# Altium PCB DAS_ad7606.PcbDoc
Units mm, origin at the board's own origin, x right, y up, seen from the top; angles counter-clockwise.
Board outline 100 x 58.42 mm, 2 copper layers (Top Layer, Bottom Layer), stack 1.58 mm thick; 39 components, 116 nets, 384 pads, 99 vias.
Unrouted connection lines stored in the file: 3.
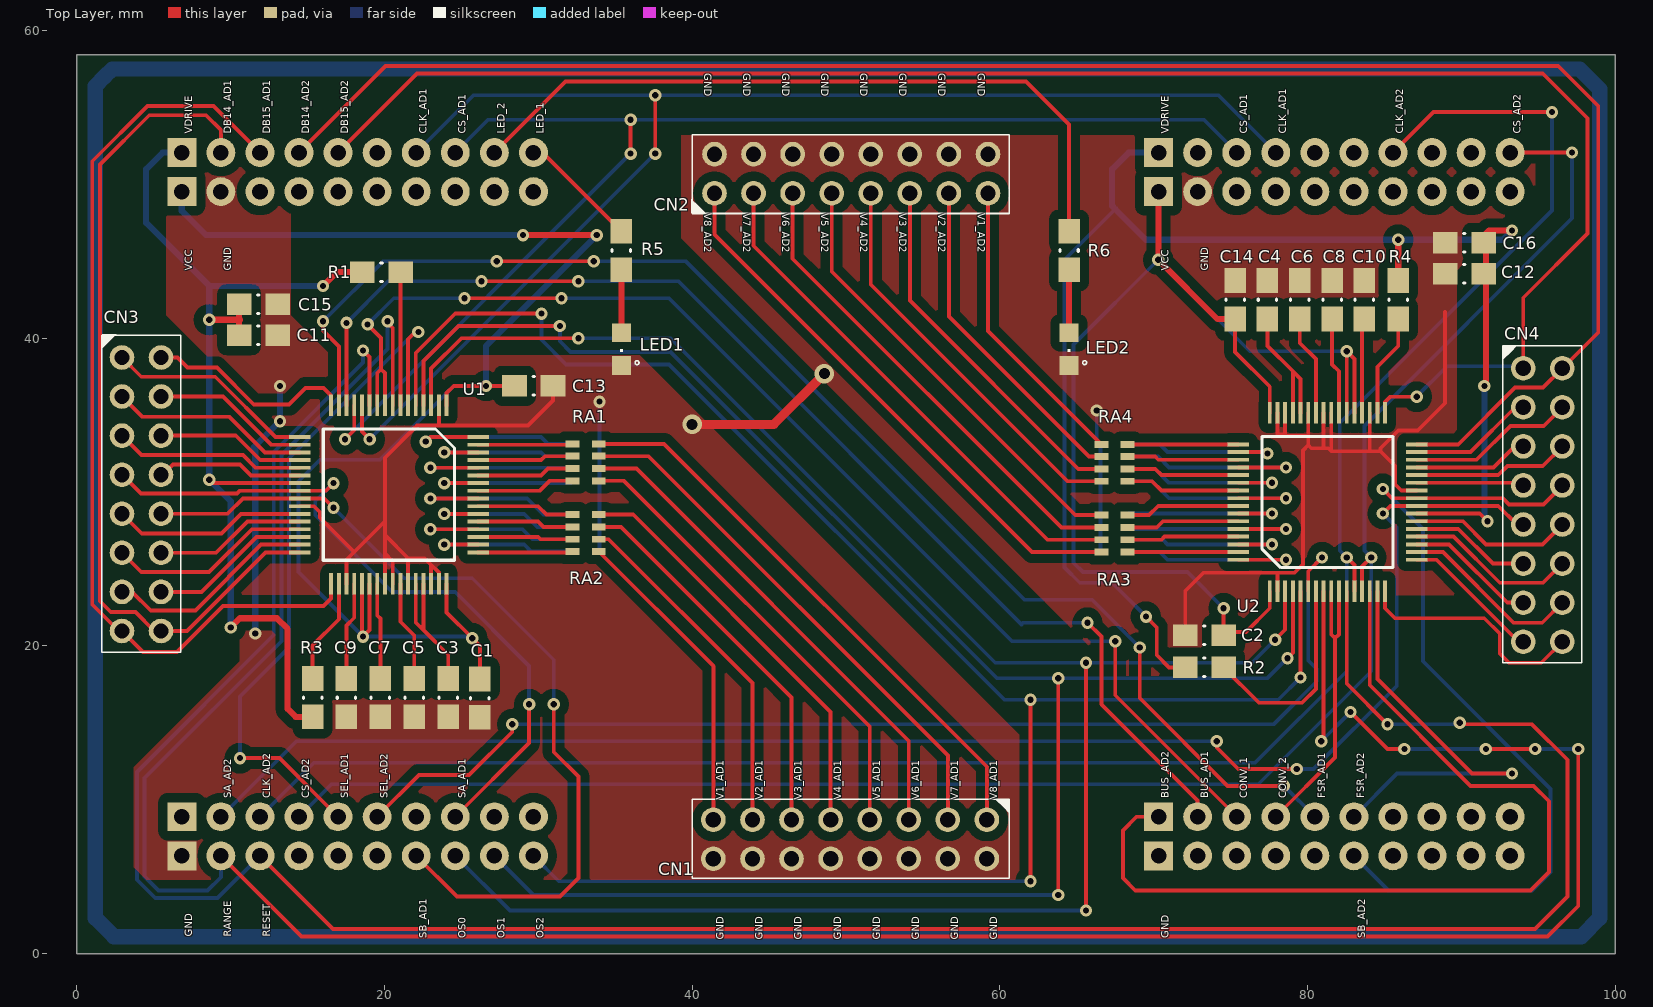
[diagram p0: Top Layer view]
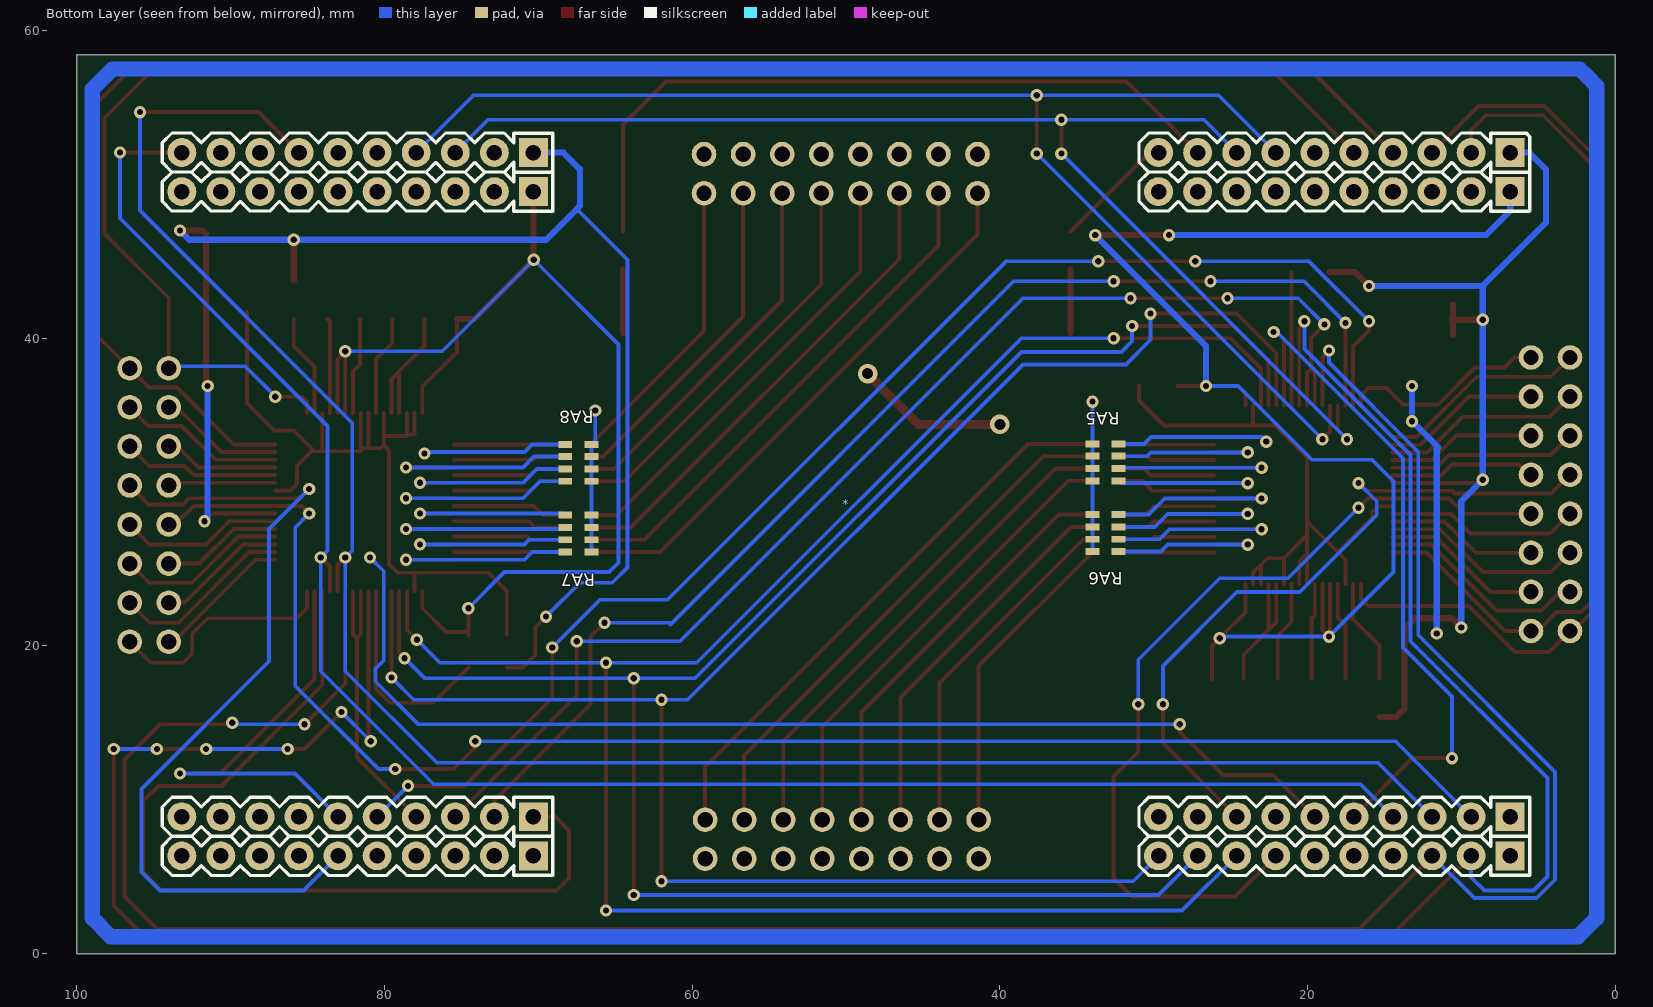
[diagram p1: Bottom Layer view, seen from below]

## Layer stack, top to bottom
Top Solder: solder mask 0.0102, Solder Resist, Dk 3.5
Top Layer: signal copper 0.0356
Dielectric 1: dielectric 1.5086, FR-4, Dk 4.8
Bottom Layer: signal copper 0.0356
Bottom Solder: solder mask 0.0102, Solder Resist, Dk 3.5

## Board outline
0,0 0,58.42 100,58.42 100,0

## Design rules (kind name [scope] priority, off if disabled: settings)
BoardOutlineClearance [All] p1: gap=0.254 ignorepadtopadclearanceinfootprint=FALSE except(0: Arc-SplitContinuation Track-SplitContinuation SMDPad-SplitContinuation THPad-SplitContinuation Via-SplitContinuation Fill-SplitContinuation Poly-SplitContinuation Region-SplitContinuation Text-SplitContinuation)
Clearance [All] p1: gap=0.25 ignorepadtopadclearanceinfootprint=FALSE except(0: Arc-Hole Track-Hole SMDPad-Hole THPad-Hole Via-Hole Fill-Hole Poly-Hole Region-Hole Text-Hole; 0.35: Arc-Region Arc-Text Track-Region Track-Text SMDPad-Region SMDPad-Text THPad-Region THPad-Text Via-Region Via-Text Fill-Region Fill-Text Poly-Region Poly-Text Region-Region Region-Text Text-Text; 0.6: Arc-Poly Track-Poly SMDPad-Poly THPad-Poly Via-Poly Fill-Poly Poly-Poly)
ComponentClearance [All] p1 off: gap=0.05 collisioncheckmode=3 verticalgap=2540 showdistances=TRUE
ComponentClearance ComponentClearance_1 [All vs (InComponentClass('PINs for PhotoBoard'))] p2 off: gap=0 collisioncheckmode=3 verticalgap=2540 showdistances=TRUE
ComponentClearance ComponentClearance_2 [All] p3: gap=0.254 collisioncheckmode=3 verticalgap=2540 showdistances=FALSE
HoleSize [All] p1: absolutevalues=TRUE maxlimit=2540 minlimit=0.4 maxpercent=80.000 minpercent=20.000
HoleToHoleClearance [All] p1: gap=0.25 allowstackedmicrovias=TRUE
MinimumSolderMaskSliver "Bottom Layer Logo Rule CLean" [(OnLayer('Bottom Solder') AND IsTrack) vs (OnLayer('Bottom Solder') AND IsTrack)] p1: minsoldermaskwidth=0.24
MinimumSolderMaskSliver "Top Layer Logo Rule CLean" [(OnLayer('Top Solder') AND IsTrack) vs (OnLayer('Top Solder') AND IsTrack)] p2: minsoldermaskwidth=0
MinimumSolderMaskSliver [All] p3: minsoldermaskwidth=0.24
PolygonConnect ThermalVias [IsVia] p1: connectstyle=Direct reliefconductorwidth=0.254 reliefentries=4 polygonreliefangle="90 Angle" airgapwidth=0.254
PolygonConnect [All] p2: connectstyle=Direct reliefconductorwidth=0.254 reliefentries=4 polygonreliefangle="90 Angle" airgapwidth=0.254
RoutingVias [All] p1: holewidth=0.4 width=0.8 viastyle="Through Hole" minholewidth=0.4 minwidth=0.8 maxholewidth=1 maxwidth=1.4
SilkToSilkClearance [All] p1 off: silktosilkclearance=0
SilkToSolderMaskClearance [IsPad] p1 off: minsilkscreentomaskgap=0.1 clearancetoexposedcopper=TRUE
SolderMaskExpansion [All] p1: expansion=0.102
Width [All] p1: maxlimit=2 minlimit=0.25 preferedwidth=0.6
24 further rules are at their usual default settings.

## Components (designator, comment, footprint, x,y, rotation, side; value= is the part's Value field where it differs from the comment)
* "Conector_C2000" Conector_C2000 50,29.21 r0 bottom locked
C1 "SMD Capacitor" CAP0805_wave 26.2,16.6 r90 top value="100nF 50V"
C2 "SMD Capacitor" CAP0805_wave 73.3,20.7 r0 top value="100nF 50V"
C3 "SMD Capacitor" CAP0805_wave 24.139,16.63 r90 top value="10UF 50V"
C4 "SMD Capacitor" CAP0805_wave 77.4,42.5 r270 top value="10UF 50V"
C5 "SMD Capacitor" CAP0805_wave 21.934,16.63 r90 top value="10UF 50V"
C6 "SMD Capacitor" CAP0805_wave 79.5,42.5 r270 top value="10UF 50V"
C7 "SMD Capacitor" CAP0805_wave 19.73,16.63 r90 top value="1UF 50V"
C8 "SMD Capacitor" CAP0805_wave 81.6,42.5 r270 top value="1UF 50V"
C9 "SMD Capacitor" CAP0805_wave 17.526,16.63 r90 top value="1UF 50V"
C10 "SMD Capacitor" CAP0805_wave 83.7,42.5 r270 top value="1UF 50V"
C11 "SMD Capacitor" CAP0805_wave 11.8,40.2 r180 top value="100nF 50V"
C12 "SMD Capacitor" CAP0805_wave 90.2,44.2 r0 top value="100nF 50V"
C13 "SMD Capacitor" CAP0805_wave 29.7,36.9 r180 top value="10UF 50V"
C14 "SMD Capacitor" CAP0805_wave 75.3,42.5 r270 top value="10UF 50V"
C15 "SMD Capacitor" CAP0805_wave 11.8,42.2 r180 top value="10UF 50V"
C16 "SMD Capacitor" CAP0805_wave 90.2,46.2 r0 top value="10UF 50V"
CN1 "Conector IDC Macho 16 Vias 90°" "HEADER 2x8 - 90g" 50.31,7.53 r180 top locked value=16vias
CN2 "Conector IDC Macho 16 Vias 90°" "HEADER 2x8 - 90g" 50.3,50.6 r0 top locked value=16vias
CN3 "Conector IDC Macho 16 Vias 90°" "HEADER 2x8 - 180g" 4.1,29.9 r270 top value=16vias
CN4 "Conector IDC Macho 16 Vias 90°" "HEADER 2x8 - 180g" 95.2,29.2 r270 top value=16vias
LED1 "LEDCHIPLED_0805" CHIPLED_0805 35.4,39.3 r180 top
LED2 "LEDCHIPLED_0805" CHIPLED_0805 64.5,39.3 r180 top
R1 "Resistor 0805" RES0805_wave 19.8,44.3 r0 top value="10k 1%"
R2 "Resistor 0805" RES0805_wave 73.3,18.6 r0 top value="10k 1%"
R3 "Resistor 0805" RES0805_wave 15.321,16.63 r270 top value="10k 1%"
R4 "Resistor 0805" RES0805_wave 85.9,42.5 r90 top value="10k 1%"
R5 "Resistor 0805" RES0805_wave 35.4,45.7 r270 top value="10k 1%"
R6 "Resistor 0805" RES0805_wave 64.5,45.7 r270 top value="10k 1%"
RA1 "Resistor Array 1206 4 vias" "RES_Array 1206 - 4 vias"#1 33.08,31.93 r270 top value="10k 1%"
RA2 "Resistor Array 1206 4 vias" "RES_Array 1206 - 4 vias"#1 33.08,27.33 r270 top value="10k 1%"
RA3 "Resistor Array 1206 4 vias" "RES_Array 1206 - 4 vias"#1 67.45,27.3 r90 top value="10k 1%"
RA4 "Resistor Array 1206 4 vias" "RES_Array 1206 - 4 vias"#1 67.45,31.9 r90 top value="10k 1%"
RA5 "Resistor Array 1206 4 vias" "RES_Array 1206 - 4 vias"#2 33.13,31.93 r270 bottom value="10k 1%"
RA6 "Resistor Array 1206 4 vias" "RES_Array 1206 - 4 vias"#2 33.13,27.33 r270 bottom value="10k 1%"
RA7 "Resistor Array 1206 4 vias" "RES_Array 1206 - 4 vias"#2 67.4,27.3 r90 bottom value="10k 1%"
RA8 "Resistor Array 1206 4 vias" "RES_Array 1206 - 4 vias"#2 67.4,31.9 r90 bottom value="10k 1%"
U1 "AD7606" "LQFP ST-64-2" 24.03,35.33 r270 top locked
U2 "AD7606" "LQFP ST-64-2" 77.55,23.85 r90 top

## Footprints (in the part's own frame and the unit in brackets; to place one, negate y for a bottom-side part, rotate by r counter-clockwise, add the part's x,y. Pads: shape width x height; smd on the part's side, far side on the other; paste and mask are expansions set on the pad)
CAP0805_wave [mm]
  rect 1.6x1.4 smd: 1(-1.25,0) 2(1.25,0)
  silkscreen extent -0.05,-0.6 0.05,0.6, body extent -1,-0.62 1,0.63, height 0.79
CHIPLED_0805 [mil] "CHIPLED_0805"
  rect 48x48 smd: A(0,-41.34) C(0,42)
  silkscreen extent -45,0 4,40, body extent -25,-40 25,40, height 43
Conector_C2000 [mil]
  rect 74x74 hole 40: 1(-1700,-900) 20(-1700,900) 21(-1700,-800) 40(-1700,800) 41(800,-900) 60(800,900) 61(800,-800) 80(800,800)
  round 74 hole 40: 2(-1600,-900) 3(-1500,-900) 4(-1400,-900) 5(-1300,-900) 6(-1200,-900) 7(-1100,-900) 8(-1000,-900) 9(-900,-900) 10(-800,-900) 11(-800,900) 12(-900,900) 13(-1000,900) 14(-1100,900) 15(-1200,900) 16(-1300,900) 17(-1400,900) 18(-1500,900) 19(-1600,900) 22(-1600,-800) 23(-1500,-800) 24(-1400,-800) 25(-1300,-800) 26(-1200,-800) 27(-1100,-800) 28(-1000,-800) 29(-900,-800) 30(-800,-800) 31(-800,800) 32(-900,800) 33(-1000,800) 34(-1100,800) 35(-1200,800) 36(-1300,800) 37(-1400,800) 38(-1500,800) 39(-1600,800) 42(900,-900) 43(1000,-900) 44(1100,-900) 45(1200,-900) 46(1300,-900) 47(1400,-900) 48(1500,-900) 49(1600,-900) 50(1700,-900) 51(1700,900) 52(1600,900) 53(1500,900) 54(1400,900) 55(1300,900) 56(1200,900) 57(1100,900) 58(1000,900) 59(900,900) 62(900,-800) 63(1000,-800) 64(1100,-800) 65(1200,-800) 66(1300,-800) 67(1400,-800) 68(1500,-800) 69(1600,-800) 70(1700,-800) 71(1700,800) 72(1600,800) 73(1500,800) 74(1400,800) 75(1300,800) 76(1200,800) 77(1100,800) 78(1000,800) 79(900,800)
  Top Layer lines w10: -800,-900 -780,-920
  silkscreen extent -1750,-950 1750,950, body extent -1749,-945 1763,955, height 429
"HEADER 2x8 - 90g" [mm]
  round 1.6 hole 1: 1(-8.85,-1.17) 2(-6.31,-1.17) 3(-3.77,-1.17) 4(-1.23,-1.17) 5(1.31,-1.17) 6(3.85,-1.17) 7(6.39,-1.17) 8(8.93,-1.17) 9(8.93,1.37) 10(6.39,1.37) 11(3.85,1.37) 12(1.31,1.37) 13(-1.23,1.37) 14(-3.77,1.37) 15(-6.31,1.37) 16(-8.85,1.37)
  silkscreen extent -10.34,-2.49 10.3,2.64, body extent -11.5,-1.47 11.54,11.87, height 10.37
"HEADER 2x8 - 180g" [mm]
  round 1.6 hole 1: 1(-8.85,-1.17) 2(-6.31,-1.17) 3(-3.77,-1.17) 4(-1.23,-1.17) 5(1.31,-1.17) 6(3.85,-1.17) 7(6.39,-1.17) 8(8.93,-1.17) 9(8.93,1.37) 10(6.39,1.37) 11(3.85,1.37) 12(1.31,1.37) 13(-1.23,1.37) 14(-3.77,1.37) 15(-6.31,1.37) 16(-8.85,1.37)
  silkscreen extent -10.34,-2.49 10.3,2.64, body extent -13.87,-4.29 14.07,4.6, height 9.56
"LQFP ST-64-2" [mm]
  rect 1.4x0.25 smd: 1(-0.3,0) 2(-0.3,-0.5) 3(-0.3,-1) 4(-0.3,-1.5) 5(-0.3,-2) 6(-0.3,-2.5) 7(-0.3,-3) 8(-0.3,-3.5) 9(-0.3,-4) 10(-0.3,-4.5) 11(-0.3,-5) 12(-0.3,-5.5) 13(-0.3,-6) 14(-0.3,-6.5) 15(-0.3,-7) 16(-0.3,-7.5) 33(11.3,-7.5) 34(11.3,-7) 35(11.3,-6.5) 36(11.3,-6) 37(11.3,-5.5) 38(11.3,-5) 39(11.3,-4.5) 40(11.3,-4) 41(11.3,-3.5) 42(11.3,-3) 43(11.3,-2.5) 44(11.3,-2) 45(11.3,-1.5) 46(11.3,-1) 47(11.3,-0.5) 48(11.3,0)
  rect 0.25x1.4 smd: 17(1.75,-9.55) 18(2.25,-9.55) 19(2.75,-9.55) 20(3.25,-9.55) 21(3.75,-9.55) 22(4.25,-9.55) 23(4.75,-9.55) 24(5.25,-9.55) 25(5.75,-9.55) 26(6.25,-9.55) 27(6.75,-9.55) 28(7.25,-9.55) 29(7.75,-9.55) 30(8.25,-9.55) 31(8.75,-9.55) 32(9.25,-9.55) 49(9.25,2.05) 50(8.75,2.05) 51(8.25,2.05) 52(7.75,2.05) 53(7.25,2.05) 54(6.75,2.05) 55(6.25,2.05) 56(5.75,2.05) 57(5.25,2.05) 58(4.75,2.05) 59(4.25,2.05) 60(3.75,2.05) 61(3.25,2.05) 62(2.75,2.05) 63(2.25,2.05) 64(1.75,2.05)
  silkscreen extent 1.23,-8.01 9.76,0.52, body extent -0.5,-9.75 11.5,2.25, height 1.6
RES0805_wave [mm] "Chip Resistor, 2-Leads, Body 2,00x1,25mm, IPC Medium Density"
  rect 1.6x1.4 smd: 1(-1.25,0) 2(1.25,0)
  silkscreen extent -0.05,-0.6 0.05,0.6, body extent -1,-0.62 1,0.63, height 0.79
"RES_Array 1206 - 4 vias"#1 [mm]
  rect 0.45x0.9 smd mask+0.095: 1(-1.2,-0.85) 2(-0.4,-0.85) 3(0.4,-0.85) 4(1.2,-0.85) 5(1.2,0.85) 6(0.4,0.85) 7(-0.4,0.85) 8(-1.2,0.85)
  body extent -1.6,-0.8 1.6,0.8, height 0.5
"RES_Array 1206 - 4 vias"#2 [mm]
  rect 0.45x0.9 smd mask+0.095: 1(-1.2,0.85) 2(-0.4,0.85) 3(0.4,0.85) 4(1.2,0.85) 5(1.2,-0.85) 6(0.4,-0.85) 7(-0.4,-0.85) 8(-1.2,-0.85)
  body extent -1.6,-0.8 1.6,0.8, height 0.5

## Part data
C1 C2 C3 C4 C5 C6 C11 C12 C13 C14 C15 C16: library part "Capacitor 0805", "CAP CER 100nF 50V 10%  0805", Manufacturer=ANY, Operating Temperature="-55°C ~ 125°C", Package / Case="0805 (2012 Metric)", Temperature Coefficient=X7R, Tolerance=±10%, Voltage - Rated=50V, ComponentLink1Description=http://www.kemet.com/docfinder?Partnumber=C0805C102K5RACTU, ComponentLink1URL=http://www.kemet.com/docfinder?Partnumber=C0805C102K5RACTU, Features=-, Height - Seated (Max)=-, Lead Spacing=-, Lead Style=-, Mounting Type="Surface Mount, MLCC", RoHS="RoHS Compliant", Size / Dimension="0.079\" L x 0.049\" W (2.00mm x 1.25mm)", Thickness (Max)="0.035\" (0.88mm)"
C7 C8 C9 C10: library part "Capacitor 0805", "CAP CER 1UF 50V 10%  0805", Manufacturer=ANY, Operating Temperature="-55°C ~ 125°C", Package / Case="0805 (2012 Metric)", Temperature Coefficient=X7R, Tolerance=±10%, Voltage - Rated=50V, ComponentLink1Description=http://www.kemet.com/docfinder?Partnumber=C0805C102K5RACTU, ComponentLink1URL=http://www.kemet.com/docfinder?Partnumber=C0805C102K5RACTU, Features=-, Height - Seated (Max)=-, Lead Spacing=-, Lead Style=-, Mounting Type="Surface Mount, MLCC", RoHS="RoHS Compliant", Size / Dimension="0.079\" L x 0.049\" W (2.00mm x 1.25mm)", Thickness (Max)="0.035\" (0.88mm)"
LED1 LED2: "<b>LED</b><p> / <u>OSRAM</u>:<br> /  / - <u>CHIPLED</u><br> / LG R971, LG N971, LY N971, LG Q971, LY Q971, LO R971, LY R971 / LH N974, LH R974<br> / LS Q976, LO Q976, LY Q976<br> / LO Q996<br> /  / - <u>Hyper CHIPLED</u><br> / LW Q18S<br> / LB Q993, LB Q99A, LB R99A<br> /  / - <u>SideLED</u><br> / LS A670, LO A670, LY A670, LG A670, LP A670<br> / LB A673, LV A673, LT A673, LW A673<br> / LH A674<br> / LY A675<br> / LS A676, LA A676, LO A676, LY A676, LW A676<br> / LS A679, LY A679, LG A679<br> /  / -  <u>Hyper Micro SIDELED®</u><br> / LS Y876, LA Y876, LO Y876, LY Y876<br> / LT Y87S<br> /  / - <u>SmartLED</u><br> / LW L88C, LW L88S<br> / LB L89C, LB L89S, LG L890<br> / LS L89K, LO L89K, LY L89K<br> / LS L896, LA L896, LO L896, LY L896<br> /  / - <u>TOPLED</u><br> / LS T670, LO T670, LY T670, LG T670, LP T670<br> / LSG T670, LSP T670, LSY T670, LOP T670, LYG T670<br> / LG T671, LOG T671, LSG T671<br> / LB T673, LV T673, LT T673, LW T673<br> / LH T674<br> / LS T676, LA T676, LO T676, LY T676, LB T676, LH T676, LSB T676, LW T676<br> / LB T67C, LV T67C, LT T67C, LS T67K, LO T67K, LY T67K, LW E67C<br> / LS E67B, LA E67B, LO E67B, LY E67B, LB E67C, LV E67C, LT E67C<br> / LW T67C<br> / LS T679, LY T679, LG T679<br> / LS T770, LO T770, LY T770, LG T770, LP T770<br> / LB T773, LV T773, LT T773, LW T773<br> / LH T774<br> / LS E675, LA E675, LY E675, LS T675<br> / LS T776, LA T776, LO T776, LY T776, LB T776<br> / LHGB T686<br> / LT T68C, LB T68C<br> /  / - <u>Hyper Mini TOPLED®</u><br> / LB M676<br> /  / - <u>Mini TOPLED Santana®</u><br> / LG M470<br> / LS M47K, LO M47K, LY M47K / <p> / Source: http://www.osram.convergy.de<p> /  / <u>LUXEON:</u><br> / - <u>LUMILED®</u><br> / LXK2-PW12-R00, LXK2-PW12-S00, LXK2-PW14-U00, LXK2-PW14-V00<br> / LXK2-PM12-R00, LXK2-PM12-S00, LXK2-PM14-U00<br> / LXK2-PE12-Q00, LXK2-PE12-R00, LXK2-PE12-S00, LXK2-PE14-T00, LXK2-PE14-U00<br> / LXK2-PB12-K00, LXK2-PB12-L00, LXK2-PB12-M00, LXK2-PB14-N00, LXK2-PB14-P00, LXK2-PB14-Q00<br> / LXK2-PR12-L00, LXK2-PR12-M00, LXK2-PR14-Q00, LXK2-PR14-R00<br> / LXK2-PD12-Q00, LXK2-PD12-R00, LXK2-PD12-S00<br> / LXK2-PH12-R00, LXK2-PH12-S00<br> / LXK2-PL12-P00, LXK2-PL12-Q00, LXK2-PL12-R00 / <p> / Source: www.luxeon.com<p> /  / <u>KINGBRIGHT:</U><p> / KA-3528ASYC<br> / Source: www.kingbright.com"
R1 R2 R3 R4 R5 R6: "RES SMD 10K OHM 1% 1/8W 0805", Manufacturer=ANY, Operating Temperature="-55°C ~ 155°C", Package / Case="0805 (2012 Metric)", Power (Watts)="0.125W, 1/8W", Temperature Coefficient=±100ppm/°C, Category=Resistors, ComponentLink1Description=http://www.yageo.com/documents/recent/PYu-RC_Group_51_RoHS_L_2.pdf, ComponentLink1URL=http://www.yageo.com/documents/recent/PYu-RC_Group_51_RoHS_L_2.pdf, Composition="Thick Film", Features="Moisture Resistant", Height="0.024\" (0.60mm)", RoHS="RoHS Compliant", Size / Dimension="0.079\" L x 0.049\" W (2.00mm x 1.25mm)"
RA1 RA2 RA3 RA4 RA5 RA6 RA7 RA8: "RES ARRAY 4 RES 10K OHM 1206", Manufacturer=Yageo, Manufacturer Part Number=YC164-JR-0710KL, Number of Resistors=4, Operating Temperature="-55°C ~ 155°C", Package / Case="1206 (3216 Metric), Convex, Long Side Terminals", Power Per Element=62.5mW, Resistance (Ohms)=10k, Temperature Coefficient=±200ppm/°C, Tolerance=±5%, Applications="DDRAM, SDRAM", Category=Resistors, Circuit Type=Isolated, ComponentLink1Description=http://www.yageo.com/NewPortal/yageodocoutput?fileName=/pdf/R-Chip/PYu-YC_TC_group_51_RoHS_L_2.pdf, ComponentLink1URL=http://www.yageo.com/NewPortal/yageodocoutput?fileName=/pdf/R-Chip/PYu-YC_TC_group_51_RoHS_L_2.pdf, Height="0.028\" (0.70mm)", Mounting Type="Surface Mount", Number of Pins=8, Packaging="Tape & Reel (TR)", RoHS="RoHS Compliant", Size / Dimension="0.126\" L x 0.063\" W (3.20mm x 1.60mm)"
U1 U2: "DAS ADC"

## Via types
v1: diameter 0.8, hole 0.4, Top Layer to Bottom Layer, 97 vias
v2: diameter 1.27, hole 0.711, Top Layer to Bottom Layer, 2 vias

## Nets (pads, with @x,y where several pads share a name; then routed paths per layer and width w, separated by ;. In a path a pad name is that pad's centre, name@x,y a point inside that pad or via, vN(x,y) a via of type N, cw(c..) or ccw(c..) an arc to the next point about the centre after c; other vN are vias at no path point)
BUSY_AD1: *.79 U1.14 | length 79.5
  Top Layer w0.25: U1.14 v1(17.53,41) ; v1(26.3,43.7) v1(32.6,43.7) ; v1(65.7,21.5) 66.6,20.6 66.6,16.2 72.86,9.94 *.79
  Bottom Layer w0.25: v1(17.53,41) 20.23,43.7 v1(26.3,43.7) ; v1(32.6,43.7) 39.1,43.7 61.4,21.4 61.5,21.5 v1(65.7,21.5)
BUSY_AD2: *.80 U2.14 | length 59.8
  Top Layer w0.25: *.80 68.89,8.89 68,8 68,4.9 68.8,4.1 94.5,4.1 95.7,5.3 95.7,9.9 94.7,10.9 90.6,10.9 84.05,17.45 U2.14
CONVST_1: *.78 U1.9 U1.10 | length 81.5
  Top Layer w0.25: v1(18.9,40.9) 19.78,40.02 19.78,37.98 ; U1.10 19.53,37.73 19.78,37.98 ; U1.9 20.03,37.73 19.78,37.98 ; v1(25.2,42.6) v1(31.5,42.6) ; v1@67.4,20.3 67.5,20.2 67.5,16.79 *.78
  Bottom Layer w0.25: v1(18.9,40.9) 20.6,42.6 v1(25.2,42.6) ; v1(31.5,42.6) 38.5,42.6 60.8,20.3 v1(67.5,20.3)
CONVST_2: *.77 U2.9 U2.10 | length 19.5
  Top Layer w0.25: *.77 81.8,12.75 81.8,20.5 ; U2.9 81.55,20.75 81.8,20.5 ; U2.10 82.05,20.75 81.8,20.5
CS_AD1: *.8 *.43 U1.13 | length 83.5
  Top Layer w0.25: v1(17.43,33.43) 18.03,34.03 U1.13 ; v1(36,52) v1(36,54.2)
  Bottom Layer w0.25: v1(17.43,33.43) v1(36,52) ; *.8 26.73,54.2 v1(36,54.2) 73.27,54.2 *.43
CS_AD2: *.37 *.50 U2.13 | length 119.6
  Top Layer w0.25: U2.13 83.55,25.15 v1(84.15,25.75) ; *.50 v1(97.2,52.07)
  Bottom Layer w0.25: *.37 16.55,11 76.8,11 84.15,18.35 v1(84.15,25.75) 83.7,26.2 83.7,34.3 97.2,47.8 v1(97.2,52.07)
DB0_AD1: CN3.16 U1.16 | length 13.6
  Top Layer w0.25: CN3.16 6.55,38.75 7.2,38.1 9.1,38.1 11.5,35.7 13.8,35.7 14.863,36.763 16.037,36.763 16.53,36.27 U1.16
DB0_AD2: CN4.9 U2.16 | length 15.4
  Top Layer w0.25: U2.16 85.05,22.45 85.7,21.8 91.493,21.8 92.5,20.793 92.5,19.5 93.1,18.9 95.2,18.9 CN4.9
DB1_AD1: CN3.1 U1.17 | length 13.7
  Top Layer w0.25: CN3.1 4.18,37.5 8.993,37.5 12.913,33.58 U1.17
DB1_AD2: CN4.8 U2.17 | length 9.1
  Top Layer w0.25: U2.17 88.4,25.6 93.73,20.27 CN4.8
DB2_AD1: CN3.15 U1.18 | length 10.3
  Top Layer w0.25: CN3.15 9.49,36.21 12.62,33.08 U1.18
DB2_AD2: CN4.10 U2.18 | length 11.9
  Top Layer w0.25: U2.18 88.8,26.1 93.4,21.5 95.26,21.5 CN4.10
DB3_AD1: CN3.2 U1.19 | length 13.1
  Top Layer w0.25: CN3.2 4.24,34.9 9.9,34.9 12.22,32.58 U1.19
DB3_AD2: CN4.7 U2.19 | length 8.5
  Top Layer w0.25: U2.19 89.2,26.6 92.99,22.81 CN4.7
DB4_AD1: CN3.14 U1.20 | length 9.7
  Top Layer w0.25: CN3.14 10.33,33.67 11.92,32.08 U1.20
DB4_AD2: CN4.11 U2.20 | length 11.2
  Top Layer w0.25: U2.20 89.5,27.1 92.5,24.1 95.32,24.1 CN4.11
DB5_AD1: CN3.3 U1.21 | length 12.4
  Top Layer w0.25: CN3.3 4.2,32.4 10.8,32.4 11.62,31.58 U1.21
DB5_AD2: CN4.6 U2.21 | length 7.9
  Top Layer w0.25: U2.21 89.8,27.6 92.05,25.35 CN4.6
DB6_AD1: CN3.13 U1.22 | length 9.6
  Top Layer w0.25: CN3.13 5.52,31.08 6.24,31.8 10.6,31.8 11.32,31.08 U1.22
DB6_AD2: CN4.12 U2.22 | length 10.6
  Top Layer w0.25: U2.22 90.1,28.1 91.6,26.6 95.28,26.6 CN4.12
DB7_SA_AD1: *.33 CN3.4 U1.24 | length 46.9
  Top Layer w0.25: CN3.4 4.16,29.9 10.4,29.9 10.58,30.08 U1.24 16.18,30.08 v1(16.68,30.58) ; *.33 29.4,13.69 v1(29.4,16.2)
  Bottom Layer w0.25: v1(16.68,30.58) 15.5,29.4 15.5,28.5 20.5,23.5 24.6,23.5 29.4,18.7 v1(29.4,16.2)
DB7_SA_AD2: *.39 CN4.5 U2.24 | length 103.1
  Top Layer w0.25: v1(74.1,13.8) 74.1,13.4 75.5,12 v1(79.3,12) ; v1(84.9,28.6) 85.4,29.1 U2.24 92.4,29.1 93.61,27.89 CN4.5
  Bottom Layer w0.25: *.39 14.27,13.8 v1(74.1,13.8) ; v1(79.3,12) 80.4,12 85.8,17.4 85.8,27.7 v1(84.9,28.6)
DB8_SB_AD1: *.14 CN3.12 U1.25 | length 57.3
  Top Layer w0.25: CN3.12 9.797,28.59 10.787,29.58 U1.25 16.08,29.58 v1(16.68,28.98) ; *.14 24.71,3.7 31.4,3.7 32.6,4.9 32.6,11.5 31,13.1 v1(31,16.2)
  Bottom Layer w0.25: v1(16.68,28.98) 21.26,24.4 25.7,24.4 31,19.1 v1(31,16.2)
DB8_SB_AD2: *.55 CN4.13 U2.25 | length 56.2
  Top Layer w0.25: v1(84.9,30.2) 85.5,29.6 U2.25 92.7,29.6 93.1,29.2 95.34,29.2 CN4.13
  Bottom Layer w0.25: *.55 85.27,4.1 94.6,4.1 95.8,5.3 95.8,10.7 87.5,19 87.5,27.6 v1(84.9,30.2)
DB9_AD1: CN3.5 U1.27 | length 12.6
  Top Layer w0.25: CN3.5 4.22,27.3 9.4,27.3 10.68,28.58 U1.27
DB9_AD2: CN4.4 U2.27 | length 7
  Top Layer w0.25: U2.27 93.86,30.6 CN4.4
DB10_AD1: CN3.11 U1.28 | length 9.9
  Top Layer w0.25: CN3.11 9.05,26.05 11.08,28.08 U1.28
DB10_AD2: CN4.14 U2.28 | length 10.2
  Top Layer w0.25: U2.28 92.4,31.1 93,31.7 95.3,31.7 CN4.14
DB11_AD1: CN3.6 U1.29 | length 13.2
  Top Layer w0.25: CN3.6 4.18,24.8 8.6,24.8 11.38,27.58 U1.29
DB11_AD2: CN4.3 U2.29 | length 7.5
  Top Layer w0.25: U2.29 92.1,31.6 93.47,32.97 CN4.3
DB12_AD1: CN3.10 U1.30 | length 10.5
  Top Layer w0.25: CN3.10 8.11,23.51 11.68,27.08 U1.30
DB12_AD2: CN4.15 U2.30 | length 10.9
  Top Layer w0.25: U2.30 91,32.1 93.2,34.3 95.36,34.3 CN4.15
DB13_AD1: CN3.7 U1.31 | length 13.8
  Top Layer w0.25: CN3.7 3.59,23.51 4.8,22.3 7.7,22.3 11.98,26.58 U1.31
DB13_AD2: CN4.2 U2.31 | length 8.1
  Top Layer w0.25: U2.31 90.6,32.6 93.51,35.51 CN4.2
DB14_AD1: *.2 CN3.9 U1.32 | length 55.3
  Top Layer w0.25: *.2 9.36,53.54 8.4,54.5 4.7,54.5 1.5,51.3 1.5,22.9 2.2,22.2 3.8,22.2 5.03,20.97 CN3.9 7.163,20.97 12.273,26.08 U1.32
DB14_AD2: *.4 CN4.16 U2.32 | length 117.4
  Top Layer w0.25: *.4 20.07,57.7 96.3,57.7 98.9,55.1 98.9,40.38 CN4.16 95.32,36.8 93.5,36.8 89.8,33.1 U2.32
DB15_AD1: *.3 CN3.8 U1.33 | length 61.8
  Top Layer w0.25: *.3 8.87,55.1 4.593,55.1 1,51.507 1,22.693 2.493,21.2 2.93,21.2 CN3.8 4.3,19.6 6.5,19.6 9.5,22.6 16.044,22.6 16.53,23.086 U1.33
DB15_AD2: *.5 CN4.1 U2.33 | length 113.2
  Top Layer w0.25: *.5 22.11,57.2 95.3,57.2 98.2,54.3 98.2,46.8 94.03,42.63 CN4.1 ; U2.33 85.05,35.85 85.4,36.2 v1(87.1,36.2)
  Bottom Layer w0.25: v1(87.1,36.2) 89.075,38.175 93.905,38.175 CN4.1
FRSTDATA_AD1: *.76 U1.15 | length 88.9
  Top Layer w0.25: v1(16,41.1) 16,40.5 17.03,39.47 U1.15 ; v1(27.3,45) v1(33.6,45) ; v1(69.1,19.9) 69.1,16.6 74.8,10.9 v1(78.47,10.9)
  Bottom Layer w0.25: v1(16,41.1) 19.9,45 v1(27.3,45) ; v1(33.6,45) 39.6,45 61.6,23 66,23 v1(69.1,19.9) ; v1(78.47,10.9) *.76
FRSTDATA_AD2: *.75 U2.15 | length 28.4
  Top Layer w0.25: U2.15 84.55,17.85 90.7,11.7 v1(93.3,11.7)
  Bottom Layer w0.25: *.75 85.83,11.7 v1(93.3,11.7)
GND: *.20 *.22 *.60 *.62 C1.1 C2.1 C3.1 C4.1 C5.1 C6.1 C7.1 C8.1 C9.1 C10.1 C11.1 C12.1 C13.1 C14.1 C15.1 C16.1 CN1.9 CN1.10 CN1.11 CN1.12 CN1.13 CN1.14 CN1.15 CN1.16 CN2.9 CN2.10 CN2.11 CN2.12 CN2.13 CN2.14 CN2.15 CN2.16 LED1.C LED2.C RA5.5 RA5.6 RA5.7 RA5.8 RA6.5 RA6.6 RA6.7 RA6.8 RA7.5 RA7.6 RA7.7 RA7.8 RA8.5 RA8.6 RA8.7 RA8.8 U1.2 U1.26 U1.35 U1.40 U1.41 U1.43 U1.46 U1.47 U2.2 U2.26 U2.35 U2.40 U2.41 U2.43 U2.46 U2.47 | length 144.2
  Top Layer w0.25: U1.26 15.42,29.08 15.792,28.708 15.792,28.338 18.03,26.1 ; U1.35 17.53,25.6 18.03,26.1 ; U1.40 20.03,26 ; U1.41 20.53,25.5 20.03,26 ; U1.43 21.53,25.7 ; U1.46 23.03,25.27 ; U1.47 23.53,24.77 23.03,25.27 ; U1.2 23.53,34.387 23.6,34.317 ; C13.1 30.95,35.95 29.317,34.317 23.6,34.317 ; C2.1 72.05,23.55 73.25,24.75 78.05,24.75 ; U2.2 78.05,24.75 ; U2.47 78.05,33.75 78.45,33.75 78.55,33.65 ; U2.46 78.55,33.65 ; U2.43 80.05,33.65 ; U2.41 81.05,32.85 ; U2.40 81.55,32.65 ; U2.35 84.05,32.65 ; U2.26 86.1,30.1 85.692,30.508 85.692,31.708 84.75,32.65 ; 88.95,41.7 88.95,35.777 87.173,34 85.9,34 84.75,32.85 84.75,32.65 ; 18.03,26.1 20.03,28.1 ; 20.03,26 20.03,27.2 ; 20.03,27.2 20.03,28.1 ; 20.03,27.2 21.53,25.7 ; 20.03,28.1 20.03,32.23 22.117,34.317 23.6,34.317 ; 21.53,25.7 22.6,25.7 23.03,25.27 ; 78.05,24.75 79.15,24.75 79.7,25.3 79.7,32.7 80.05,33.05 ; 78.55,33.65 80.05,33.65 ; 80.05,33.05 80.25,32.85 81.05,32.85 ; 80.05,33.05 80.05,33.65 ; 81.05,32.85 81.35,32.85 81.55,32.65 ; 81.55,32.65 84.05,32.65 ; 84.05,32.65 84.75,32.65
  Top Layer w0.6: v2@40.3,34.4 45.3,34.4 v2(48.6,37.7)
  Bottom Layer w0.25: RA6.5 RA6.6 RA6.7 RA6.8 RA5.5 RA5.6 RA5.7 RA5.8 v1(33.98,35.88) v1@34,35.9 ; v1(66.3,35.3) 66.3,33.35 RA8.5 RA8.6 RA8.7 RA8.8 RA7.5 RA7.6 RA7.7 RA7.8
  Bottom Layer w0.4: v1(11.6,20.8) 11.6,32.8 11.5,32.9 v1(13.2,34.6) v1(13.2,36.9)
  other v2: 40,34.4
lED_1: *.10 R5.1 | length 7.8
  Top Layer w0.254: *.10 30.28,52.07 R5.1
LED_2: *.9 R6.1 | length 47.4
  Top Layer w0.254: *.9 31.768,56.698 61.702,56.698 64.5,53.9 R6.1
NetC3_2: C3.2 U1.44 U1.45 | length 10
  Top Layer w0.25: U1.44 22.03,21.53 22.53,21.03 ; U1.45 22.53,21.03 ; C3.2 24.139,19.422 22.53,21.03
NetC4_2: C4.2 U2.44 U2.45 | length 9.7
  Top Layer w0.25: C4.2 77.4,39.5 79.05,37.85 ; U2.45 79.05,37.85 ; U2.44 79.55,37.35 79.05,37.85
NetC5_2: C5.2 U1.42 | length 6.5
  Top Layer w0.25: U1.42 21.03,21.57 21.934,20.666 C5.2
NetC6_2: C6.2 U2.42 | length 6.5
  Top Layer w0.25: C6.2 79.5,39.7 80.55,38.65 U2.42
NetC7_2: C7.2 U1.39 | length 6.2
  Top Layer w0.25: U1.39 19.53,21.97 19.73,21.77 C7.2
NetC8_2: C8.2 U2.39 | length 6.3
  Top Layer w0.25: C8.2 81.6,38.3 82.05,37.85 U2.39
NetC9_2: C9.2 U1.36 | length 6.4
  Top Layer w0.25: C9.2 17.526,21.326 18.03,21.83 U1.36
NetC10_2: C10.2 U2.36 | length 6.2
  Top Layer w0.25: U2.36 83.55,41.1 C10.2
NetLED1_A: LED1.A R5.2 | length 4.1
  Top Layer w0.4: LED1.A R5.2
NetLED2_A: LED2.A R6.2 | length 4.1
  Top Layer w0.4: LED2.A R6.2
NetR1_2: R1.2 U1.7 | length 8.7
  Top Layer w0.25: U1.7 21.03,36.485 21.03,44.28 R1.2
NetR2_2: R2.2 U2.7 | length 13.7
  Top Layer w0.25: R2.2 76.85,16.3 79.65,16.3 80.55,17.2 U2.7
NetR3_1: R3.1 U1.34 | length 6.9
  Top Layer w0.25: R3.1 15.321,20.022 17.03,21.73 U1.34
NetR4_1: R4.1 U2.34 | length 6.7
  Top Layer w0.25: U2.34 84.55,38.15 85.9,39.5 R4.1
NetRA1_R1A: RA1.1 U1.63 | length 6.2
  Top Layer w0.25: U1.63 32.18,33.08 RA1.1
NetRA1_R2A: RA1.2 U1.61 | length 6.3
  Top Layer w0.25: U1.61 30.18,32.08 30.43,32.33 RA1.2
NetRA1_R3A: RA1.3 U1.59 | length 6.3
  Top Layer w0.25: U1.59 30.18,31.08 30.63,31.53 RA1.3
NetRA1_R4A: RA1.4 U1.57 | length 6.4
  Top Layer w0.25: U1.57 30.08,30.08 30.73,30.73 RA1.4
NetRA2_R1A: RA2.1 U1.55 | length 6.4
  Top Layer w0.25: U1.55 29.98,29.08 30.53,28.53 RA2.1
NetRA2_R2A: RA2.2 U1.53 | length 6.3
  Top Layer w0.25: U1.53 29.98,28.08 30.33,27.73 RA2.2
NetRA2_R3A: RA2.3 U1.51 | length 6.2
  Top Layer w0.25: U1.51 29.98,27.08 30.13,26.93 RA2.3
NetRA2_R4A: RA2.4 U1.49 | length 6.2
  Top Layer w0.25: U1.49 32.23,26.08 RA2.4
NetRA3_R1A: RA3.1 U2.63 | length 7.2
  Top Layer w0.25: RA3.1 U2.63
NetRA3_R2A: RA3.2 U2.61 | length 7.3
  Top Layer w0.25: RA3.2 70.5,26.9 70.7,27.1 U2.61
NetRA3_R3A: RA3.3 U2.59 | length 7.4
  Top Layer w0.25: RA3.3 70.2,27.7 70.6,28.1 U2.59
NetRA3_R4A: RA3.4 U2.57 | length 7.4
  Top Layer w0.25: RA3.4 69.7,28.5 70.3,29.1 U2.57
NetRA4_R1A: RA4.1 U2.55 | length 7.4
  Top Layer w0.25: RA4.1 69.9,30.7 70.5,30.1 U2.55
NetRA4_R2A: RA4.2 U2.53 | length 7.4
  Top Layer w0.25: RA4.2 70.1,31.5 70.5,31.1 U2.53
NetRA4_R3A: RA4.3 U2.51 | length 7.3
  Top Layer w0.25: RA4.3 70.1,32.3 70.3,32.1 U2.51
NetRA4_R4A: RA4.4 U2.49 | length 7.2
  Top Layer w0.25: RA4.4 U2.49
NetRA5_R1A: RA5.1 U1.64 | length 13
  Top Layer w0.25: v1(22.68,33.28) 22.98,33.58 U1.64
  Bottom Layer w0.25: 22.98,33.58 30.18,33.58 30.63,33.13 RA5.1
NetRA5_R2A: RA5.2 U1.62 | length 10.7
  Top Layer w0.25: v1(23.88,32.58) U1.62
  Bottom Layer w0.25: v1(23.88,32.58) 30.18,32.58 30.43,32.33 RA5.2
NetRA5_R3A: RA5.3 U1.60 | length 12.4
  Top Layer w0.25: v1(22.98,31.58) U1.60
  Bottom Layer w0.25: v1(22.98,31.58) 32.23,31.58 RA5.3
NetRA5_R4A: RA5.4 U1.58 | length 10.7
  Top Layer w0.25: v1(23.88,30.58) U1.58
  Bottom Layer w0.25: v1(23.88,30.58) 32.13,30.58 RA5.4
NetRA6_R1A: RA6.1 U1.56 | length 12.8
  Top Layer w0.25: v1(22.98,29.58) U1.56
  Bottom Layer w0.25: v1(22.98,29.58) 29.28,29.58 30.33,28.53 RA6.1
NetRA6_R2A: RA6.2 U1.54 | length 11
  Top Layer w0.25: v1(23.88,28.58) U1.54
  Bottom Layer w0.25: v1(23.88,28.58) 29.08,28.58 29.93,27.73 RA6.2
NetRA6_R3A: RA6.3 U1.52 | length 12.8
  Top Layer w0.25: v1@22.88,27.58 v1(22.98,27.58) U1.52
  Bottom Layer w0.25: v1(22.98,27.58) 28.98,27.58 29.63,26.93 RA6.3
NetRA6_R4A: RA6.4 U1.50 | length 10.8
  Top Layer w0.25: v1(23.88,26.58) U1.50
  Bottom Layer w0.25: v1(23.88,26.58) 29.08,26.58 29.53,26.13 RA6.4
NetRA7_R1A: RA7.1 U2.64 | length 13.7
  Top Layer w0.25: U2.64 v1(78.6,25.6)
  Bottom Layer w0.25: RA7.1 70.4,26.1 70.9,25.6 v1(78.6,25.6)
NetRA7_R2A: RA7.2 U2.62 | length 11.8
  Top Layer w0.25: U2.62 v1(77.7,26.6)
  Bottom Layer w0.25: RA7.2 70.6,26.9 70.9,26.6 v1(77.7,26.6)
NetRA7_R3A: RA7.3 U2.60 | length 13.5
  Top Layer w0.25: U2.60 v1(78.6,27.6)
  Bottom Layer w0.25: RA7.3 68.35,27.6 v1(78.6,27.6)
NetRA7_R4A: RA7.4 U2.58 | length 11.7
  Top Layer w0.25: U2.58 v1(77.7,28.6)
  Bottom Layer w0.25: RA7.4 68.35,28.6 v1(77.7,28.6)
NetRA8_R1A: RA8.1 U2.56 | length 13.9
  Top Layer w0.25: U2.56 v1(78.6,29.6)
  Bottom Layer w0.25: RA8.1 69.9,30.7 71,29.6 v1(78.6,29.6)
NetRA8_R2A: RA8.2 U2.54 | length 12
  Top Layer w0.25: U2.54 v1(77.7,30.6)
  Bottom Layer w0.25: RA8.2 70.1,31.5 71,30.6 v1(77.7,30.6)
NetRA8_R3A: RA8.3 U2.52 | length 13.8
  Top Layer w0.25: U2.52 v1(78.6,31.6) v1@78.7,31.6
  Bottom Layer w0.25: RA8.3 70.3,32.3 71,31.6 v1(78.6,31.6)
NetRA8_R4A: RA8.4 U2.50 | length 11.3
  Top Layer w0.25: U2.50 v1@77.4,32.6
  Bottom Layer w0.25: RA8.4 70.4,33.1 70.9,32.6 v1@77.4,32.6
  other v1: 77.4,32.5
OS0: *.13 U1.3 U2.3 | length 129.4
  Top Layer w0.25: U1.3 23.03,38.03 25,40 v1(32.6,40) ; v1(65.6,2.8) v1(65.6,18.9) ; v1(77.9,20.4) 78.55,21.05 U2.3
  Bottom Layer w0.25: *.13 28.15,2.8 v1(65.6,2.8) ; v1(32.6,40) 38.6,40 59.7,18.9 v1(65.6,18.9) 76.4,18.9 v1(77.9,20.4)
OS1: *.12 U1.4 U2.4 | length 126.9
  Top Layer w0.25: U1.4 22.53,38.53 24.8,40.8 v1(31.4,40.8) ; v1(63.8,3.8) v1(63.8,17.9) ; v1(78.7,19.2) 79.05,19.55 U2.4
  Bottom Layer w0.25: *.12 29.69,3.8 v1(63.8,3.8) ; v1(31.4,40.8) 31.4,39.8 32.1,39.1 38.6,39.1 59.8,17.9 v1(63.8,17.9) 77.4,17.9 v1(78.7,19.2)
OS2: *.11 U1.5 U2.5 | length 124.6
  Top Layer w0.25: U1.5 22.03,39.03 24.6,41.6 v1(30.2,41.6) ; v1(62,4.7) v1(62,16.5) ; v1@79.55,17.75 v1(79.55,17.95) U2.5
  Bottom Layer w0.25: *.11 31.33,4.7 v1(62,4.7) ; v1(30.2,41.6) 30.2,39.9 31.8,38.3 38.5,38.3 60.3,16.5 v1(62,16.5) 78.1,16.5 v1(79.55,17.95)
"P/S/B SEL_AD1": *.36 U1.6 | length 45.7
  Top Layer w0.25: v1(10.6,12.7) 13.17,12.7 *.36 ; U1.6 21.53,39.93 22,40.4 v1(22.2,40.4)
  Bottom Layer w0.25: v1(10.6,12.7) 10.6,16.7 13.8,19.9 13.8,32.2 22,40.4 v1(22.2,40.4)
"P/S/B SEL_AD2": *.35 U2.6 | length 76.2
  Top Layer w0.25: *.35 22.23,11.6 25.5,11.6 28.3,14.4 v1(28.3,14.9) ; U2.6 80.05,24.85 v1(80.95,25.75)
  Bottom Layer w0.25: v1(28.3,14.9) 77.8,14.9 80.6,17.7 80.6,18.5 80.05,19.05 80.05,24.85 v1(80.95,25.75)
RANGE: *.19 U1.8 U2.8 | length 184.8
  Top Layer w0.25: *.19 14.61,1.1 95.6,1.1 97.6,3.1 v1(97.6,13.3) ; v1@20.3,40.9 20.53,40.67 U1.8 ; v1(80.9,13.8) 81.05,13.95 U2.8 ; v1(82.8,15.7) 85.2,13.3 v1(86.3,13.3) ; v1(91.6,13.3) v1(94.8,13.3)
  Bottom Layer w0.25: *.19 9.36,4.96 8.5,4.1 5.3,4.1 4.4,5 4.4,11.4 13.3,20.3 13.3,32.407 20.2,39.307 v1(20.2,41.1) ; v1(80.9,13.8) v1(82.8,15.7) ; v1(86.3,13.3) v1(91.6,13.3) ; v1(94.8,13.3) v1(97.6,13.3)
RD_SCLK_AD1: *.7 *.44 U1.12 | length 91.4
  Top Layer w0.25: U1.12 18.53,33.93 v1(19.03,33.43) ; v1(37.6,52) v1(37.6,55.8)
  Bottom Layer w0.25: v1(19.03,33.43) v1(37.6,52) ; *.7 25.79,55.8 v1(37.6,55.8) 74.21,55.8 *.44
RD_SCLK_AD2: *.38 *.47 U2.12 | length 130.7
  Top Layer w0.25: v1(82.55,25.75) 83.05,25.25 U2.12 ; *.47 88.19,54.7 v1(95.9,54.7)
  Bottom Layer w0.25: *.38 15.41,12.4 76.6,12.4 82.55,18.35 v1(82.55,25.75) 82.1,26.2 82.1,34.5 95.9,48.3 v1(95.9,54.7)
RESET: *.18 U1.11 U2.11 | length 173.1
  Top Layer w0.25: *.18 16.65,1.6 94.8,1.6 96.9,3.7 96.9,12.6 94.6,14.9 90,14.9 v1(89.9,15) ; v1(18.6,39.2) 19.03,38.77 U1.11 ; U2.11 82.55,17.55 v1(85.2,14.9)
  Bottom Layer w0.25: *.18 9.15,3.6 5.093,3.6 3.9,4.793 3.9,11.8 12.8,20.7 12.8,32.614 18.6,38.414 v1(18.6,39.2) ; v1(85.2,14.9) 89.8,14.9 v1(89.9,15)
V1_AD1: CN1.8 RA2.5 | length 20.5
  Top Layer w0.25: RA2.5 41.38,18.68 CN1.8
V1_AD2: CN2.8 RA4.5 | length 19.4
  Top Layer w0.25: CN2.8 59.23,40.47 RA4.5
V2_AD1: CN1.7 RA2.6 | length 22.7
  Top Layer w0.25: RA2.6 34.57,26.93 43.92,17.58 CN1.7
V2_AD2: CN2.7 RA4.6 | length 21.7
  Top Layer w0.25: CN2.7 56.69,41.41 65.8,32.3 RA4.6
V3_AD1: CN1.6 RA2.7 | length 25.1
  Top Layer w0.25: RA2.7 35.37,27.73 46.46,16.64 CN1.6
V3_AD2: CN2.6 RA4.7 | length 24
  Top Layer w0.25: CN2.6 54.15,42.45 65.1,31.5 RA4.7
V4_AD1: CN1.5 RA2.8 | length 27.4
  Top Layer w0.25: RA2.8 36.17,28.53 49,15.7 CN1.5
V4_AD2: CN2.5 RA4.8 | length 26.2
  Top Layer w0.25: CN2.5 51.61,43.49 64.4,30.7 RA4.8
V5_AD1: CN1.4 RA1.5 | length 30.3
  Top Layer w0.25: RA1.5 35.57,30.73 51.54,14.76 CN1.4
V5_AD2: CN2.4 RA3.5 | length 29.2
  Top Layer w0.25: CN2.4 49.07,44.33 64.9,28.5 RA3.5
V6_AD1: CN1.3 RA1.6 | length 32.6
  Top Layer w0.25: RA1.6 36.37,31.53 54.08,13.82 CN1.3
V6_AD2: CN2.3 RA3.6 | length 31.6
  Top Layer w0.25: CN2.3 46.53,45.17 64,27.7 RA3.6
V7_AD1: CN1.2 RA1.7 | length 34.9
  Top Layer w0.25: RA1.7 37.17,32.33 56.62,12.88 CN1.2
V7_AD2: CN2.2 RA3.7 | length 33.9
  Top Layer w0.25: CN2.2 43.99,46.01 63.1,26.9 RA3.7
V8_AD1: CN1.1 RA1.8 | length 37.4
  Top Layer w0.25: RA1.8 38.17,33.13 59.16,12.14 CN1.1
V8_AD2: CN2.1 RA3.8 | length 36.4
  Top Layer w0.25: CN2.1 41.45,46.75 62.1,26.1 RA3.8
VCC: *.21 *.61 C1.2 C2.2 C13.2 C14.2 U1.1 U1.37 U1.38 U1.48 U2.1 U2.37 U2.38 U2.48 | length 175.4
  Top Layer w0.25: U1.37 18.53,20.67 v1(18.6,20.6) 19.03,21.03 U1.38 ; U1.48 24.03,22.17 v1(25.7,20.5) 26.2,20 C1.2 ; U1.1 24.03,36.43 24.5,36.9 v1(26.6,36.9) C13.2 ; C2.2 C2.2@74.55,20.9 ; v1(74.55,22.45) C2.2@74.55,20.9 ; C14.2 75.3,39.1 77.55,36.85 U2.48 ; U2.1 77.55,22.45 76,20.9 C2.2@74.55,20.9 ; U2.38 v1(82.55,39.15) 83.05,38.65 U2.37
  Top Layer w0.4: v1(29,46.7) v1(33.8,46.7) ; *.61 70.32,45.08 74.15,41.25 C14.2
  Bottom Layer w0.25: v1@18.54,20.6 v1(18.6,20.6) ; v1(25.7,20.5) 25.6,20.6 v1(18.6,20.6) ; v1(26.6,36.9) 24.5,36.9 19.7,32.1 15.8,32.1 14.4,30.7 14.4,24.8 v1(18.6,20.6) ; v1(74.55,22.45) 72.2,24.8 65.4,24.8 64.8,25.4 64.8,39.6 v1(70.3,45.1) 76.25,39.15 v1(82.55,39.15)
  Bottom Layer w0.4: *.21 6.82,48.28 8.4,46.7 v1(29,46.7) ; v1(26.6,36.9) 26.6,39.5 v1(33.8,46.7)
Vdrive: *.1 *.41 C11.2 C12.2 C15.2 C16.2 R1.1 R2.1 R3.2 R4.2 U1.23 U2.23 | length 163.8
  Top Layer w0.25: v1(8.6,30.8) 8.82,30.58 U1.23 ; v1(69.5,21.9) 70.2,21.2 70.2,19.4 71,18.6 R2.1 ; U2.23 91.2,28.6 v1(91.7,28.1)
  Top Layer w0.4: v1(8.6,41.2) 10.6,41.2 ; v1(10,21.2) 10.6,21.8 13,21.8 13.7,21.1 13.7,15.9 14.22,15.38 R3.2 ; C11.2 10.55,41.15 10.6,41.2 ; C15.2 10.55,41.25 10.6,41.2 ; v1(16,43.4) 16.9,44.3 R1.1 ; R4.2 v1(85.9,46.4) ; v1(91.5,36.9) 91.6,37 91.6,46.8 91.8,47 v1(93.3,47)
  Bottom Layer w0.25: 67.5,48.4 64.2,45.1 64.2,25.1 65.2,24.1 67.3,24.1 v1(69.5,21.9)
  Bottom Layer w0.4: *.1 5.57,52.07 4.5,51 4.5,47.5 8.6,43.4 ; v1(10,21.2) 10,29.4 v1(8.6,30.8) v1(8.6,41.2) 8.6,43.4 ; v1(16,43.4) 8.6,43.4 ; *.41 68.37,52.07 67.3,51 67.3,48.6 67.5,48.4 69.5,46.4 v1(85.9,46.4) 92.7,46.4 v1(93.3,47) ; v1(91.5,36.9) 91.5,28.3 v1(91.7,28.1)
pads on no net: *.6 *.15 *.16 *.17 *.23 *.24 *.25 *.26 *.27 *.28 *.29 *.30 *.31 *.32 *.34 *.40 *.42 *.45 *.46 *.48 *.49 *.51 *.52 *.53 *.54 *.56 *.57 *.58 *.59 *.63 *.64 *.65 *.66 *.67 *.68 *.69 *.70 *.71 *.72 *.73 *.74
copper on no net: | length 306.6
  Bottom Layer w1: 1.2,55.4 1.2,56.4 ; 1.2,55.4 1.2,56.4 ; 1.2,55.4 1.2,2.3 2.4,1.1 97.8,1.1 99,2.3 99,56.2 97.7,57.5 2.3,57.5 1.8,57 1.2,56.4

## Polygon pours and split planes (outlines as drawn)
GND on Top Layer "GND" (solid, pour order 0): 39.3,53.2 94,53.2 94.8,52.4 94.8,49.5 89.7,44.4 89.7,23.3 80.35,23.3 75.1,18.05 67.75,18.05 39.3,46.5
GND on Top Layer "Bottom Layer-No Net" (solid, pour order 2): 61.4,14.1 36.6,38.9 16.5,38.9 13.9,41.5 13.9,50.07 11.9,52.07 6.82,52.07 5.8,51.05 5.8,41.5 10.6,36.7 10.6,19 3.7,12.1 3.7,5.6 4.5,4.8 61.4,4.8

## Silkscreen, mask and mechanical layers (free items; w line width, h text height)
Top Overlay:
  text "GND" at 40.61,57.22 h0.8 r270
  text "GND" at 43.15,57.22 h0.8 r270
  text "GND" at 45.69,57.22 h0.8 r270
  text "GND" at 48.23,57.22 h0.8 r270
  text "GND" at 50.77,57.22 h0.8 r270
  text "GND" at 53.31,57.22 h0.8 r270
  text "GND" at 55.85,57.22 h0.8 r270
  text "GND" at 58.39,57.22 h0.8 r270
  text "VDRIVE" at 7.66,53.28 h0.8 r90
  text "DB14_AD1" at 10.2,53.28 h0.8 r90
  text "DB15_AD1" at 12.74,53.28 h0.8 r90
  text "DB14_AD2" at 15.28,53.28 h0.8 r90
  text "DB15_AD2" at 17.82,53.28 h0.8 r90
  text "CLK_AD1" at 22.9,53.28 h0.8 r90
  text "CS_AD1" at 25.44,53.28 h0.8 r90
  text "LED_2" at 27.98,53.28 h0.8 r90
  text "LED_1" at 30.52,53.28 h0.8 r90
  text "VDRIVE" at 71.16,53.28 h0.8 r90
  text "CS_AD1" at 76.24,53.28 h0.8 r90
  text "CLK_AD1" at 78.78,53.28 h0.8 r90
  text "CLK_AD2" at 86.4,53.28 h0.8 r90
  text "CS_AD2" at 94.02,53.28 h0.8 r90
  text "V8_AD2" at 40.61,48.12 h0.8 r270
  text "V7_AD2" at 43.15,48.12 h0.8 r270
  text "V6_AD2" at 45.69,48.12 h0.8 r270
  text "V5_AD2" at 48.23,48.12 h0.8 r270
  text "V4_AD2" at 50.77,48.12 h0.8 r270
  text "V3_AD2" at 53.31,48.12 h0.8 r270
  text "V2_AD2" at 55.85,48.12 h0.8 r270
  text "V1_AD2" at 58.39,48.12 h0.8 r270
  text "VCC" at 7.66,44.38 h0.8 r90
  text "GND" at 10.2,44.38 h0.8 r90
  text "VCC" at 71.16,44.38 h0.8 r90
  text "GND" at 73.7,44.38 h0.8 r90
  text "SA_AD2" at 10.2,10.1 h0.8 r90
  text "CLK_AD2" at 12.74,10.1 h0.8 r90
  text "CS_AD2" at 15.28,10.1 h0.8 r90
  text "SEL_AD1" at 17.82,10.1 h0.8 r90
  text "SEL_AD2" at 20.36,10.1 h0.8 r90
  text "SA_AD1" at 25.44,10.1 h0.8 r90
  text "BUS_AD2" at 71.16,10.1 h0.8 r90
  text "BUS_AD1" at 73.7,10.1 h0.8 r90
  text "CONV_1" at 76.24,10.1 h0.8 r90
  text "CONV_2" at 78.78,10.1 h0.8 r90
  text "FSR_AD1" at 81.32,10.1 h0.8 r90
  text "FSR_AD2" at 83.86,10.1 h0.8 r90
  text "V1_AD1" at 42.22,10.01 h0.8 r90
  text "V2_AD1" at 44.76,10.01 h0.8 r90
  text "V3_AD1" at 47.3,10.01 h0.8 r90
  text "V4_AD1" at 49.84,10.01 h0.8 r90
  text "V5_AD1" at 52.38,10.01 h0.8 r90
  text "V6_AD1" at 54.92,10.01 h0.8 r90
  text "V7_AD1" at 57.46,10.01 h0.8 r90
  text "V8_AD1" at 60,10.01 h0.8 r90
  text "GND" at 7.66,1.1 h0.8 r90
  text "RANGE" at 10.2,1.1 h0.8 r90
  text "RESET" at 12.74,1.1 h0.8 r90
  text "SB_AD1" at 22.9,1 h0.8 r90
  text "OS0" at 25.44,1 h0.8 r90
  text "OS1" at 27.98,1 h0.8 r90
  text "OS2" at 30.52,1 h0.8 r90
  text "GND" at 71.16,1 h0.8 r90
  text "SB_AD2" at 83.91,1 h0.8 r90
  text "GND" at 42.22,0.91 h0.8 r90
  text "GND" at 44.76,0.91 h0.8 r90
  text "GND" at 47.3,0.91 h0.8 r90
  text "GND" at 49.84,0.91 h0.8 r90
  text "GND" at 52.38,0.91 h0.8 r90
  text "GND" at 54.92,0.91 h0.8 r90
  text "GND" at 57.46,0.91 h0.8 r90
  text "GND" at 60,0.91 h0.8 r90
Top Solder:
  drawing of 69 lines, arcs and shapes, not listed
Mechanical 1:
  the board outline again, w0.254